# Altium PCB PCB1.PcbDoc
Units mm, origin at the board's own origin, x right, y up, seen from the top; angles counter-clockwise.
Board outline 46.99 x 36.83 mm, 2 copper layers (Top Layer, Bottom Layer); 19 components, 30 nets, 96 pads, 6 vias.
Unrouted connection lines stored in the file: 1.
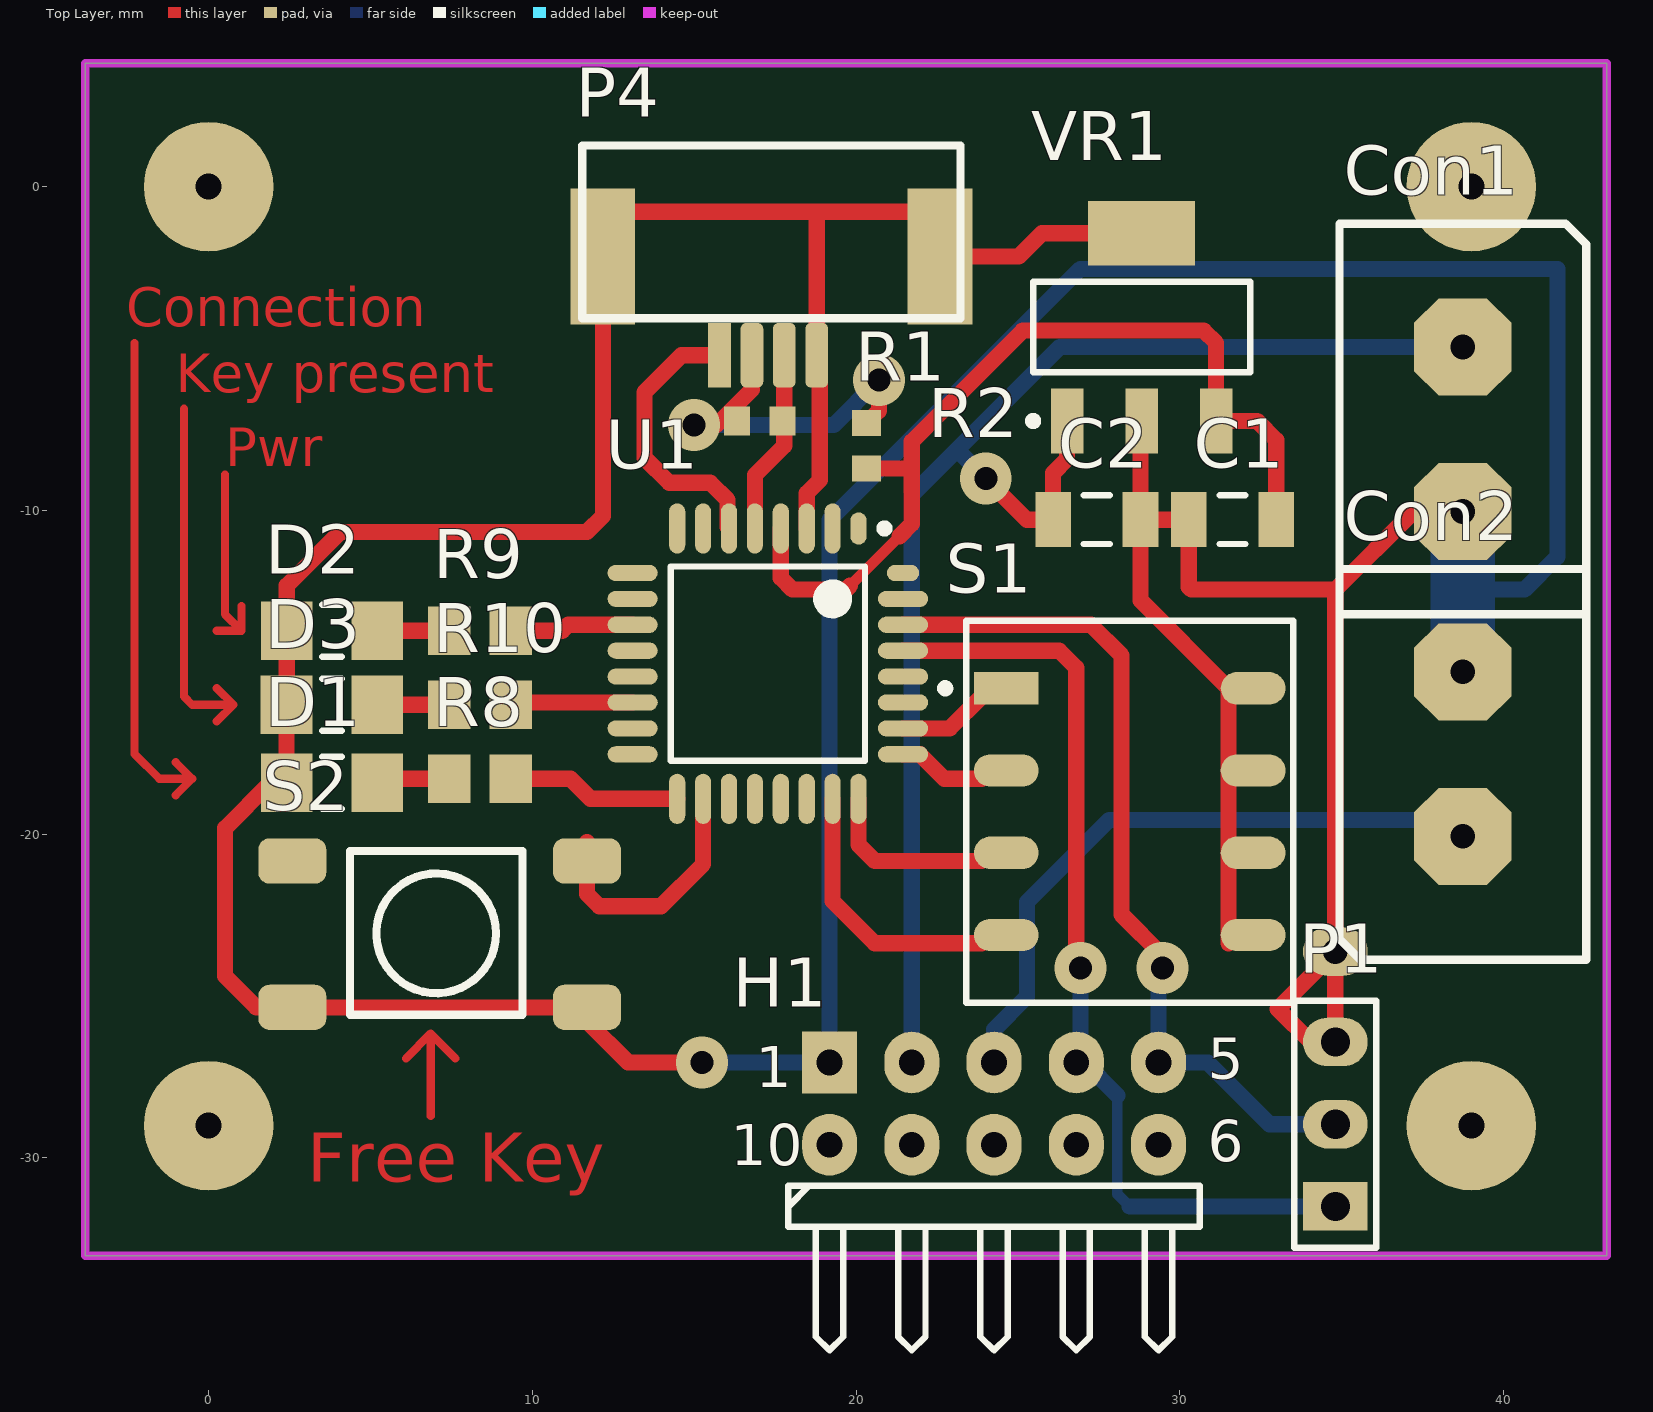
[diagram p0: Top Layer view]
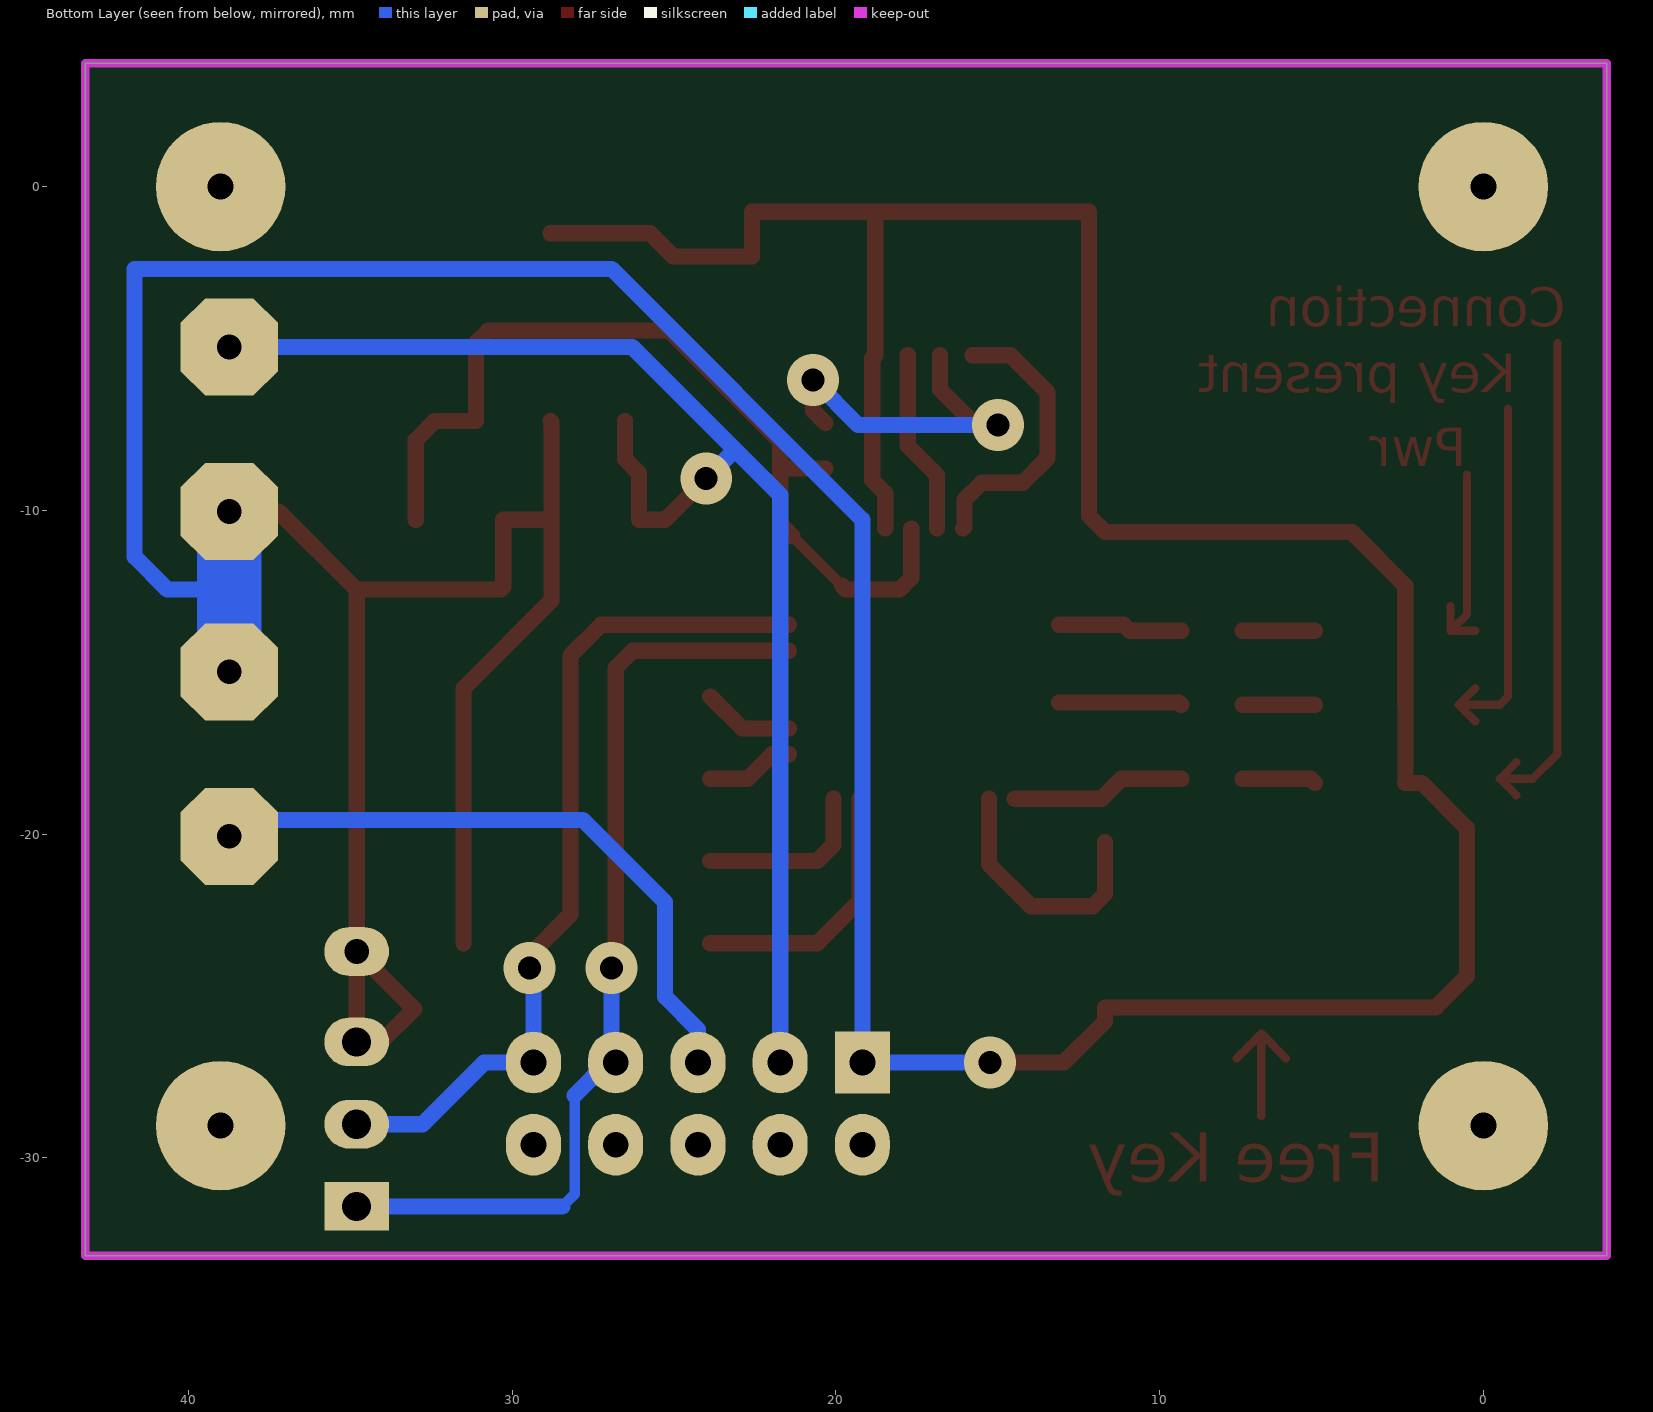
[diagram p1: Bottom Layer view, seen from below]

## Layer stack, top to bottom
Top Layer: signal copper 0.0356
Dielectric: dielectric 0.32, FR-4, Dk 4.8
Bottom Layer: signal copper 0.0356

## Board outline
-3.81,-33.02 -3.81,3.81 43.18,3.81 43.18,-33.02

## Design rules (kind name [scope] priority, off if disabled: settings)
Clearance [All] p1: gap=0.254
PolygonConnect [All] p1: connectstyle=Relief reliefconductorwidth=0.254 reliefentries=4 polygonreliefangle="90 Angle" airgapwidth=0.254
RoutingVias [All] p1: holewidth=0.711 width=1.27 viastyle="Through Hole" minholewidth=0.711 minwidth=1.27 maxholewidth=0.711 maxwidth=1.27
SolderMaskExpansion [All] p1: expansion=0.102
Width [All] p1: maxlimit=0.54 minlimit=0.5 preferedwidth=0.54
28 further rules are at their usual default settings.

## Components (designator, comment, footprint, x,y, rotation, side; value= is the part's Value field where it differs from the comment)
C1 "Cap" C1206 31.623,-10.287 r180 top
C2 "Cap" C1206 27.432,-10.287 r0 top
Con1 "PWConnector" PWConnector 38.735,-4.953 r270 top
Con2 "PWConnector" PWConnector 38.735,-20.066 r90 top
D1 "LED2" 3216[1206] 3.81,-18.415 r180 top
D2 "LED2" 3216[1206] 3.81,-13.716 r180 top
D3 "LED2" 3216[1206] 3.807,-16.002 r180 top
H1 "Component_1" Header10Coude 19.177,-29.591 r0 top
P1 "Header 3" HDR1X3 34.798,-31.496 r90 top
P4 "Header 6" "Edge Connector 4pts 1mm" 18.78,-5.207 r180 top
R1 "Res Semi" 1608[0603] 20.32,-8.001 r270 top
R2 "Res Semi" 1608[0603] 17.018,-7.239 r180 top
R8 "Res Semi" 2012[0805] 8.382,-18.288 r180 top
R9 "Res Semi" 2012[0805] 8.382,-13.716 r180 top
R10 "Res Semi" 2012[0805] 8.382,-16.002 r180 top
S1 "SW DIP-4" DIP-P8 28.448,-19.304 r270 top
S2 "SW-PB" Switch 2.584,-25.348 r90 top
U1 "C8051F312" TQFP80P900X900X160-32N 17.272,-14.732 r270 top
VR1 "Volt Reg" PG-SOT-223-4 26.478,-8.327 r270 top

## Footprints (in the part's own frame and the unit in brackets; to place one, negate y for a bottom-side part, rotate by r counter-clockwise, add the part's x,y. Pads: shape width x height; smd on the part's side, far side on the other; paste and mask are expansions set on the pad)
1608[0603] [mm] "Chip Capacitor, Body 1.6x0.8mm, IPC High Density"
  rect 0.8x0.9 smd: 1(-0.7,0) 2(0.7,0)
  body extent -0.87,-0.48 0.87,0.48, height 1.3
2012[0805] [mm] "Chip Resistor; Body 2.0 x 1.3 mm (LxW typ)"
  rect 1.3x1.5 smd: 1(-0.95,0) 2(0.95,0)
3216[1206] [mm] "Chip Resistor; Body 3.2 x 1.6 mm (LxW typ)"
  rect 1.6x1.8 smd: 1(-1.4,0) 2(1.4,0)
  silkscreen extent -0.3,-0.8 0.3,0.8
C1206 [mm] "Chip Capacitor, Body 3.2x1.6mm, IPC High Density"
  rect 1.1x1.7 smd: 1(-1.35,0) 2(1.35,0)
  silkscreen extent -0.4,-0.75 0.4,0.75, body extent -1.7,-0.9 1.7,0.9, height 1.3
DIP-P8 [mm] "Dual-Pole Dual-Throw Relay; 8 Leads"
  rect 1x2 smd: 1(-3.81,-3.81)
  oval 1x2 smd: 2(-1.27,-3.81) 3(1.27,-3.81) 4(3.81,-3.81) 5(3.81,3.81) 6(1.27,3.81) 7(-1.27,3.81) 8(-3.81,3.81)
  silkscreen extent -5.9,-5.82 5.9,5.05
"Edge Connector 4pts 1mm" [mm]
  rect 0.7x2 smd: 1(3,0)
  rrect50% 0.7x2 smd: 2(2,0) 3(1,0) 4(0,0)
  rect 2x4.2 smd: 5(-3.81,-3.048) 6(6.604,-3.048)
  silkscreen extent -4.44,-6.48 7.24,-1.14
HDR1X3 [mm] "Connector; Header; 3 Position"
  rect 1.5x2 hole 0.9: 1(0,0)
  oval 1.5x2 hole 0.9: 2(2.54,0) 3(5.08,0)
  silkscreen extent -1.27,-1.27 6.35,1.27
Header10Coude [mm]
  rect 1.7x1.9 hole 0.8: 1(0,2.54)
  oval 1.7x1.9 hole 0.8: 2(2.54,2.54) 3(5.08,2.54) 4(7.62,2.54) 5(10.16,2.54) 6(10.16,0) 7(7.62,0) 8(5.08,0) 9(2.54,0) 10(0,0)
  silkscreen extent -1.27,-6.35 11.43,-1.27, body extent -2.43,-7.24 12.74,3.51, height 5.36
PG-SOT-223-4 [mm]
  rect 2x1 smd: 1(-1.088,0.037) 2(-1.088,2.337) 3(-1.088,4.637)
  rect 2x3.3 smd: 2(-6.888,2.337)
  silkscreen extent -5.39,-1.14 -0.96,5.69, body extent -5.84,-1.01 -2.14,5.69, height 1.7
PWConnector [mm]
  oct 3x3 hole 0.762: 1(0,0) 2(5.08,0)
  silkscreen extent -3.81,-3.81 8.25,3.81
Switch [mm]
  rrect50% 1.4x2.1 smd: 1(4.52,0) 1(4.52,-9.1) 2(0,0) 2(0,-9.1)
  silkscreen extent -0.23,-7.11 4.83,-1.78
TQFP80P900X900X160-32N [mm] "TQFP, 32-Leads, Body 9,0x9,0mm (max), Pitch 0,80mm, IPC Medium Density"
  oval 1x0.5 smd: 1(-4.175,2.8)
  oval 1.55x0.5 smd: 2(-4.175,2) 3(-4.175,1.2) 4(-4.175,0.4) 5(-4.175,-0.4) 6(-4.175,-1.2) 7(-4.175,-2) 8(-4.175,-2.8) 17(4.175,-2.8) 18(4.175,-2) 19(4.175,-1.2) 20(4.175,-0.4) 21(4.175,0.4) 22(4.175,1.2) 23(4.175,2) 24(4.175,2.8)
  oval 0.5x1.55 smd: 9(-2.8,-4.175) 10(-2,-4.175) 11(-1.2,-4.175) 12(-0.4,-4.175) 13(0.4,-4.175) 14(1.2,-4.175) 15(2,-4.175) 16(2.8,-4.175) 25(2.8,4.175) 26(2,4.175) 27(1.2,4.175) 28(0.4,4.175) 29(-0.4,4.175) 30(-1.2,4.175) 31(-2,4.175)
  oval 0.5x1 smd: 32(-2.8,4.175)
  silkscreen extent -4.3,-3 3,3.73, body extent -3.5,-3.5 3.5,3.5, height 1.6

## Part data
C1 C2: "Capacitor"
D1 D2 D3: "Typical RED, GREEN, YELLOW, AMBER GaAs LED"
P1: "Header, 3-Pin"
P4: "Header, 6-Pin"
R1 R2 R8 R9 R10: "Semiconductor Resistor"
S1: "DIP Switch, 4 Position, SPST"
S2: "Switch"
U1: library part C8051F310, "Microcontrôleur Silabs"
VR1: "Voltage Regulator"

## Free pads (board coordinates)
  round 4 hole 0.8: 0(0,-29) 0(0,0) 0(39,-29) 0(39,0)
  oval 2x1.5 hole 0.762: 1(34.798,-23.622)

## Via types
v1: diameter 1.6, hole 0.711, Top Layer to Bottom Layer, 6 vias

## Nets (pads, with @x,y where several pads share a name; then routed paths per layer and width w, separated by ;. In a path a pad name is that pad's centre, name@x,y a point inside that pad or via, vN(x,y) a via of type N, cw(c..) or ccw(c..) an arc to the next point about the centre after c; other vN are vias at no path point)
5V: C2.1 Con1.1 H1.2 VR1.1 | length 43.5
  Top Layer w0.5: v1(24.003,-9.017) 25.273,-10.287 C2.1 26.082,-8.843 26.515,-8.41 VR1.1
  Bottom Layer w0.5: H1.2 21.717,-9.525 23.114,-8.128 ; v1(24.003,-9.017) 23.114,-8.128 ; Con1.1 26.289,-4.953 23.114,-8.128
12V: Con2.1 H1.3 | length 20.1
  Bottom Layer w0.5: H1.3 24.257,-26.035 25.273,-25.019 25.273,-22.098 27.813,-19.558 38.227,-19.558 Con2.1
C2CK: P4.3 R2.1 U1.5 | length 5.7
  Top Layer w0.5: U1.5 16.872,-8.909 17.78,-8.001 P4.3
C2D: P4.1 U1.6 | length 8.8
  Top Layer w0.5: P4.1 14.605,-5.207 13.462,-6.35 13.462,-8.382 14.224,-9.144 15.494,-9.144 16.026,-9.676 16.026,-10.511 U1.6
GND: C1.2 C2.2 Con1.2 Con2.2 D1.2 D2.2 D3.2 H1.1 P1.3 P4.4 P4.5 P4.6 pad.1 S1.5 S1.6 S1.7 S1.8 S2.2 U1.3 VR1.2 | length 190.1
  Top Layer w0.5: v1(15.24,-27.051) 12.954,-27.051 11.684,-25.781 11.684,-25.348 2.584,-25.348 1.472,-25.348 0.508,-24.384 0.508,-19.812 1.905,-18.415 D1.2 2.407,-18.412 D3.2 2.41,-15.999 D2.2 2.41,-12.322 4.064,-10.668 11.684,-10.668 12.176,-10.176 P4.6 12.176,-0.778 18.796,-0.778 ; U1.3 18.472,-9.468 18.876,-9.064 18.876,-5.303 P4.4 18.78,-0.794 18.796,-0.778 ; VR1.2@28.815,-7.239 28.782,-7.272 C2.2 ; VR1.2@28.815,-1.439 25.739,-1.439 25.019,-2.159 P4.5 22.59,-0.778 18.796,-0.778 ; S1.5@31.496,-23.368 31.496,-15.494 28.782,-12.78 C2.2 ; P1.3@34.036,-26.416 33.02,-25.4 pad.1 ; P1.3 pad.1 ; Con1.2 37.211,-10.033 34.798,-12.446 ; C2.2 C1.2 30.273,-12.366 30.353,-12.446 34.798,-12.446 ; pad.1 34.798,-12.446
  Bottom Layer w0.5: v1(15.24,-27.051) H1.1 19.177,-10.287 26.924,-2.54 41.656,-2.54 41.656,-11.43 40.64,-12.446 38.735,-12.446 ; Con2.2 Con2.2@39.37,-14.986
  Bottom Layer w2: Con2.2 38.735,-12.446 Con1.2
NetD1_1: D1.1 R8.2 | length 2.3
  Top Layer w0.5: D1.1 5.337,-18.288 R8.2
NetD2_1: D2.1 R9.2 | length 2.2
  Top Layer w0.5: D2.1 R9.2
NetD3_1: D3.1 R10.2 | length 2.2
  Top Layer w0.5: D3.1 R10.2
NetR8_1: R8.1 U1.17 | length 5.4
  Top Layer w0.5: R8.1 11.176,-18.288 11.795,-18.907 U1.17
NetR9_1: R9.1 U1.11 | length 3.8
  Top Layer w0.5: R9.1 10.922,-13.716 11.106,-13.532 U1.11
NetR10_1: R10.1 U1.14 | length 3.8
  Top Layer w0.5: R10.1 9.402,-15.932 U1.14
NetS1_1: S1.1 U1.26 | length 2.8
  Top Layer w0.5: U1.26 22.892,-16.732 S1.1@23.876,-15.748
NetS1_2: S1.2 U1.25 | length 2.7
  Top Layer w0.5: U1.25 21.969,-17.532 22.725,-18.288 S1.2@23.876,-18.288
NetS1_3: S1.3 U1.24 | length 5.4
  Top Layer w0.5: U1.24 20.072,-20.326 20.574,-20.828 S1.3@23.876,-20.828
NetS1_4: S1.4 U1.23 | length 8.3
  Top Layer w0.5: U1.23 19.272,-22.066 20.574,-23.368 S1.4@23.876,-23.368
NetS2_1: S2.1 U1.18 | length 7.9
  Top Layer w0.5: S2.1@11.684,-20.245 11.684,-21.844 12.065,-22.225 13.97,-22.225 15.272,-20.923 U1.18
NetU1_1: U1.1
NetU1_2: U1.2
NetU1_19: U1.19
NetU1_20: U1.20
NetU1_21: U1.21
NetU1_22: U1.22
NetU1_27: U1.27
NetU1_28: U1.28
NetU1_31: U1.31
NetU1_32: U1.32
RST: P4.2 R1.1 R2.2 | length 11.1
  Top Layer w0.5: v1(14.986,-7.366) 15.684,-7.366 16.78,-6.27 P4.2 ; R1.1 20.701,-6.92 v1(20.701,-5.969)
  Bottom Layer w0.5: v1(14.986,-7.366) 19.304,-7.366 v1(20.701,-5.969)
RX: H1.4 P1.1 U1.29 | length 30.5
  Top Layer w0.5: U1.29 26.27,-14.332 26.797,-14.859 26.797,-23.495 26.924,-23.622 v1(26.924,-24.13)
  Bottom Layer w0.33: 28.067,-28.067 28.067,-31.115 28.448,-31.496
  Bottom Layer w0.5: v1(26.924,-24.13) 26.924,-23.622 26.924,-26.924 H1.4 27.051,-27.051 28.067,-28.067 ; 28.448,-31.496 P1.1
TX: H1.5 P1.2 U1.30 | length 27.6
  Top Layer w0.5: U1.30 27.248,-13.532 28.194,-14.478 28.194,-22.479 29.464,-23.749 v1(29.464,-24.13)
  Bottom Layer w0.5: v1(29.464,-24.13) 29.464,-23.749 29.337,-23.622 H1.5 30.861,-27.051 32.766,-28.956 P1.2
V3.3: C1.1 R1.2 U1.4 VR1.3 | length 28.5
  Top Layer w0.33: 19.812,-12.319 21.336,-10.795
  Top Layer w0.5: U1.4 17.672,-12.084 18.034,-12.446 19.685,-12.446 19.812,-12.319 ; R1.2 21.652,-8.701 21.717,-8.636 ; 21.336,-10.795 21.717,-10.414 21.717,-8.636 ; C1.1 32.973,-7.827 32.385,-7.239 VR1.3 31.115,-4.826 30.734,-4.445 25.146,-4.445 21.717,-7.874 21.717,-8.636
pads on no net: H1.6 H1.7 H1.8 H1.9 H1.10 U1.7 U1.8 U1.9 U1.10 U1.12 U1.13 U1.15 U1.16
copper on no net: | length 40.2
  Top Layer w0.254: -2.286,-4.826 -2.286,-17.526 -1.524,-18.288 -0.508,-18.288 ; -1.016,-18.796 -0.508,-18.288 ; -1.016,-17.78 -0.508,-18.288 ; -0.762,-6.858 -0.762,-15.748 -0.508,-16.002 0.762,-16.002 ; 0.254,-16.51 0.762,-16.002 ; 0.254,-15.494 0.762,-16.002 ; 0.254,-13.716 0.508,-13.716 1.016,-13.716 ; 0.508,-8.89 0.508,-13.208 1.016,-13.716 ; 6.096,-26.924 6.858,-26.162 ; 6.858,-28.702 6.858,-26.162 ; 7.62,-26.924 6.858,-26.162 ; 1.016,-13.716 1.016,-12.954 1.016,-13.716

## Keep-outs
Keep-Out Layer:
  the board outline again, w0.254

## Other copper
Top Layer:
  text "Connection" at -2.54,-4.318 h1.2
  text "Key present" at -1.016,-6.35 h1.2
  text "Pwr" at 0.508,-8.636 h1.2
  text "Free Key" at 3.048,-30.734 h1.52

## Text inside footprints (layer, text, board x,y; h text height)
H1: Top Overlay "10" at 16.129,-30.226 h1.27; Top Overlay "1" at 16.891,-27.813 h1.27; Top Overlay "6" at 30.861,-30.099 h1.27; Top Overlay "5" at 30.861,-27.559 h1.27